# Altium PCB UP-Buzzer-PCB.PcbDoc
Units mil, origin at the board's own origin, x right, y up, seen from the top; angles counter-clockwise.
Board outline 740 x 1530 mil, 2 copper layers (Top Layer, Bottom Layer), stack 65.8 mil thick; 22 components, 34 nets, 90 pads, 5 vias.
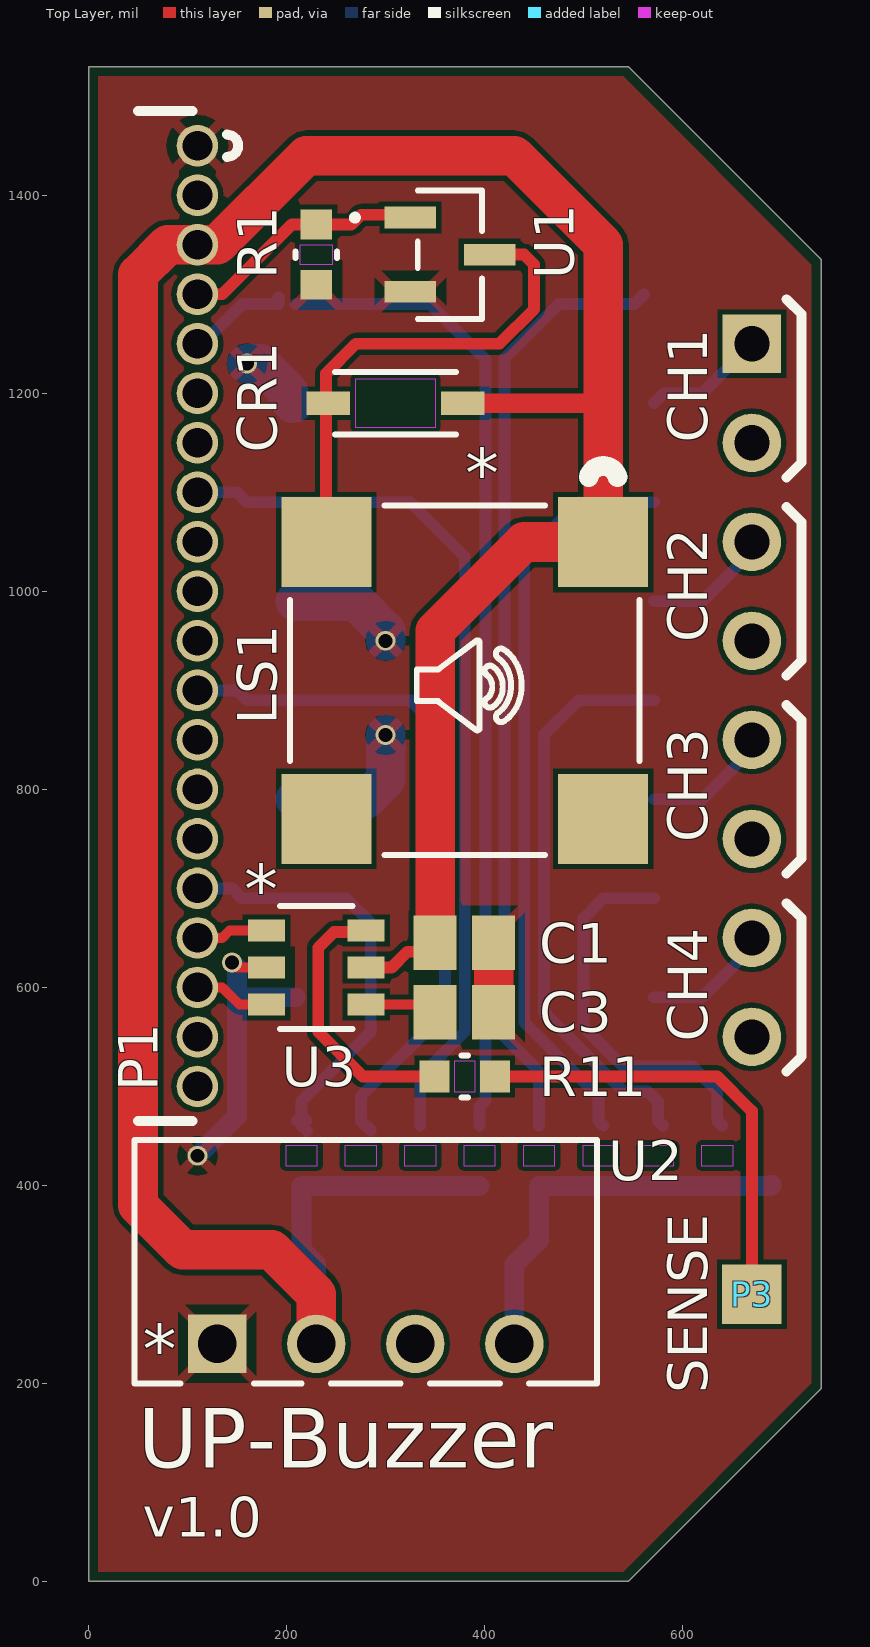
[diagram p0: Top Layer view]
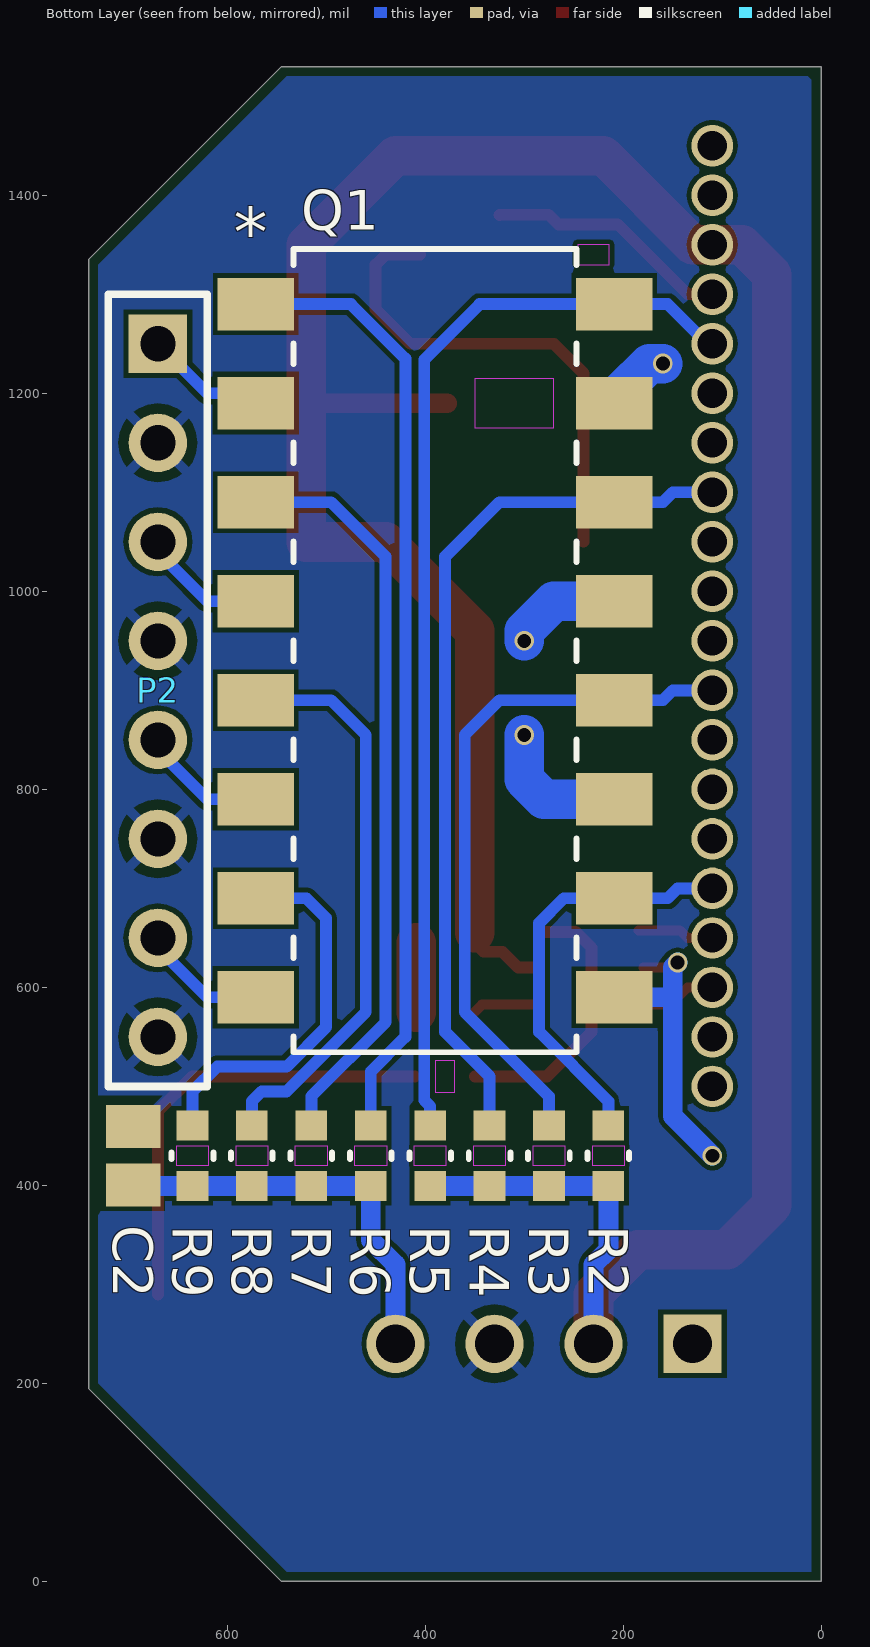
[diagram p1: Bottom Layer view, seen from below]
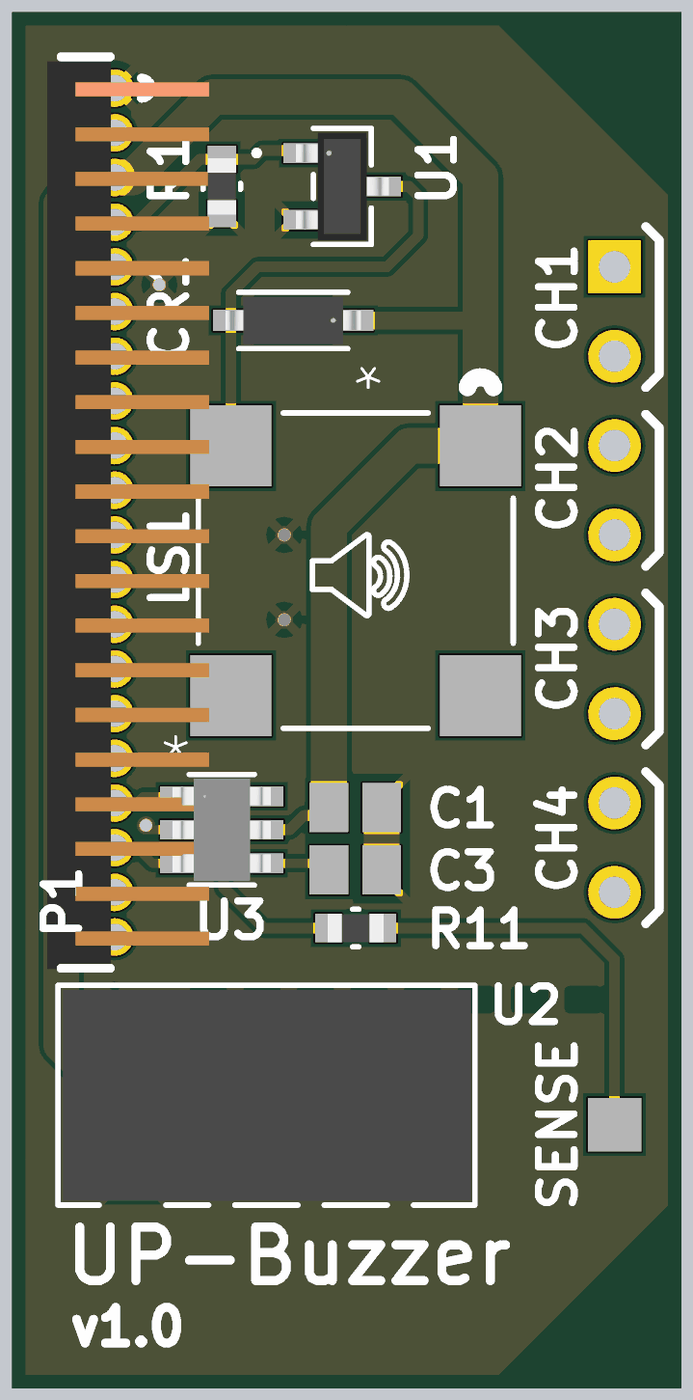
[diagram p2: 3D render of the assembled board from above, using the file's embedded part models]
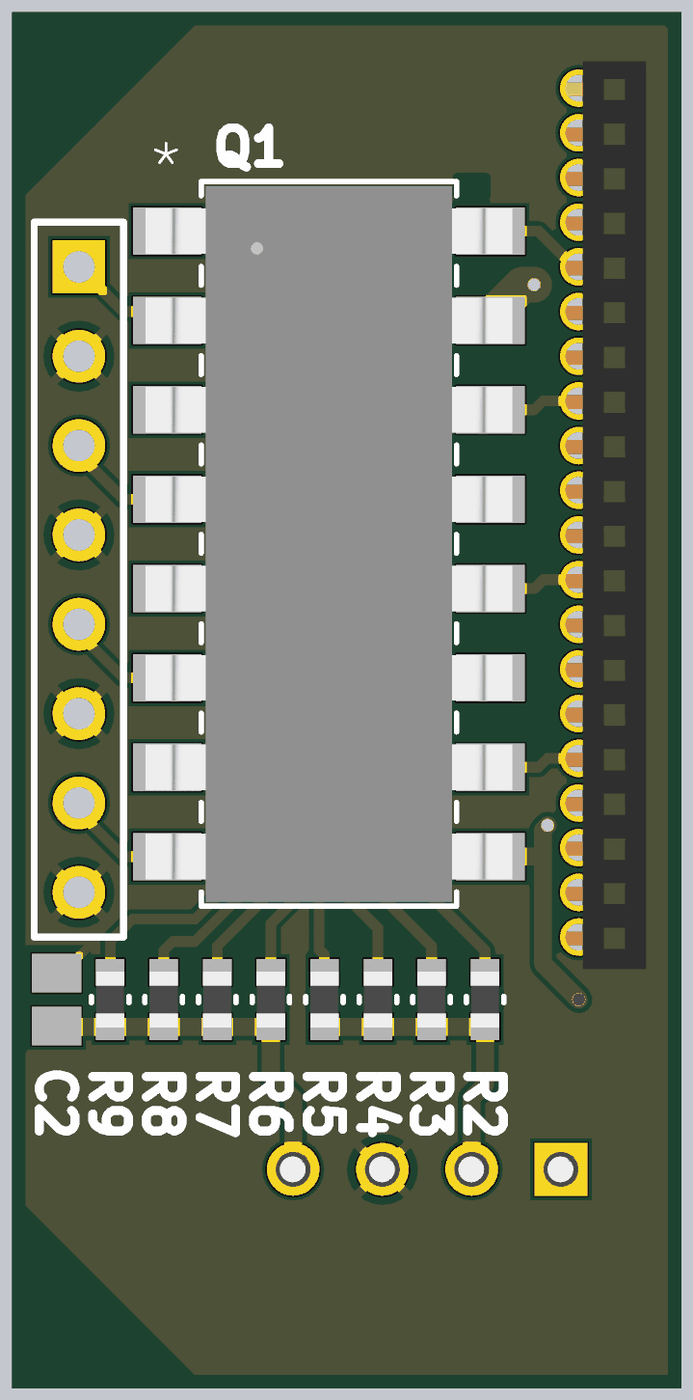
[diagram p3: 3D render of the assembled board from below, using the file's embedded part models]

## Layer stack, top to bottom
Top Solder: solder mask 0.4, Solder Resist, Dk 3.5
Top Layer: signal copper 1.4
Dielectric 1: dielectric 63, FR-4, Dk 4.8
Bottom Layer: signal copper 1.4
Bottom Solder: solder mask 0.4, Solder Resist, Dk 3.5

## Board outline
0,0 545,0 740,195 740,1335 545,1530 0,1530

## Design rules (kind name [scope] priority, off if disabled: settings)
Clearance [All] p1: gap=5 ignorepadtopadclearanceinfootprint=FALSE
ComponentClearance [All] p1: gap=5 collisioncheckmode=3 verticalgap=5 showdistances=TRUE
DiffPairsRouting [All] p1: maxlimit=10 minlimit=5 mostfreqgap=5 toplayer_minwidth=5 toplayer_maxwidth=1000 toplayer_prefwidth=5 bottomlayer_minwidth=5 bottomlayer_maxwidth=1000 bottomlayer_prefwidth=5 maxuncoupledlength=500
Height [All] p1: minheight=0 maxheight=71497.94 prefheight=500
HoleSize [All] p1: absolutevalues=TRUE maxlimit=248.03 minlimit=11.81 maxpercent=80.000 minpercent=20.000
HoleToHoleClearance ViaHoleToHoleClearance [IsVia vs IsVia] p1: gap=8 allowstackedmicrovias=FALSE
HoleToHoleClearance [All] p2: gap=10 allowstackedmicrovias=TRUE
MinimumAnnularRing [All] p1: minimumring=3
MinimumSolderMaskSliver [All] p1: minsoldermaskwidth=0
PlaneClearance [All] p1: clearance=5
PlaneConnect PlaneConnectPowerPads [InPadClass('PowerPads')] p1: planeconnectstyle=Direct reliefexpansion=20 reliefentries=4 reliefconductorwidth=10 reliefairgap=10
PlaneConnect [All] p2: planeconnectstyle=Relief reliefexpansion=20 reliefentries=4 reliefconductorwidth=10 reliefairgap=10
PolygonConnect PolygonConnectPowerPads [All vs (InPadClass('PowerPads'))] p1: connectstyle=Direct reliefconductorwidth=10 reliefentries=4 polygonreliefangle="90 Angle" airgapwidth=10
PolygonConnect [All] p2: connectstyle=Relief reliefconductorwidth=10 reliefentries=4 polygonreliefangle="45 Angle" airgapwidth=10
RoutingVias [All] p1: holewidth=11.81 width=23.62 viastyle="Through Hole" minholewidth=6 minwidth=12 maxholewidth=248.03 maxwidth=248.03
SilkToSilkClearance [All] p1: silktosilkclearance=0
SilkToSolderMaskClearance [IsPad] p1: minsilkscreentomaskgap=5.91 clearancetoexposedcopper=TRUE
SolderMaskExpansion [All] p1: expansion=2 istentingtop=FALSE
UnpouredPolygon BoardOutlineClearance [All] p2:
Width [All] p1: maxlimit=1000 minlimit=10 preferedwidth=12
Width Power [InNet('+3V3') or InNet('+12V')Or InNet('+3V3_ISO') Or InNet('GND') Or InNet('GND_ISO')] p2: maxlimit=1000 minlimit=20 preferedwidth=40 minimp=50.000000 maximp=50.000000 favimp=50.000000
20 further rules are at their usual default settings.

## Classes and differential pairs
component class Isolated-Inputs-Schematic: C1 C2 P2 Q1 R2 R3 R4 R5 R6 R7 R8 R9 U2
component class Buzzer-Schematic: CR1 LS1 P1 R1 U1
component class Proximity-Sensor-Schematic: C3 P3 R11 U3
net class CH_ISO[1..4]: CH_ISO1 CH_ISO2 CH_ISO3 CH_ISO4

## Components (designator, comment, footprint, x,y, rotation, side; value= is the part's Value field where it differs from the comment)
C1 "Cap Pol3" C0805 379.53,645 r0 top
C2 "Cap Pol3" C0805 695,430 r90 bottom
C3 "Cap Pol3" C0805 379.53,575 r0 top
CR1 "1N4148W-7-F" SOD123_DIO 310,1190 r180 top
LS1 "MLT-8530" MLT-8530_JHE 380,910 r270 top
P1 "SMS-120-01-T-S" SMS-S-120 110,1450 r270 top locked
P2 "Header 8" HDR1X8 670,1250 r270 bottom
P3 "Pad" Simple-PAD-PCB 670,290 r90 top
Q1 "LTV-847S" LTV-847S_LTO 390,940 r180 bottom
R1 "RC0603FR-07470RL" RC0603N_YAG 230,1340 r90 top
R2 "50k" RC0603N_YAG 215,430 r270 bottom
R3 "50k" RC0603N_YAG 275,430 r270 bottom
R4 "50k" RC0603N_YAG 335,430 r270 bottom
R5 "50k" RC0603N_YAG 395,430 r270 bottom
R6 "1k" RC0603N_YAG 455,430 r270 bottom
R7 "1k" RC0603N_YAG 515,430 r270 bottom
R8 "1k" RC0603N_YAG 575,430 r270 bottom
R9 "1k" RC0603N_YAG 635,430 r270 bottom
R11 "470" RC0603N_YAG 380,510 r180 top
U1 "IRLML6344TRPBF" IRLML6344TRPBF_INF 365,1340 r270 top
U2 "B0303S-1WR3" SIP4_B_S-1WR3_MNS 130,240 r0 top
U3 "IQS127D-00000-TSR" TSOT23-6_AZQ 230,620 r0 top

## Footprints (in the part's own frame and the unit in brackets; to place one, negate y for a bottom-side part, rotate by r counter-clockwise, add the part's x,y. Pads: shape width x height; smd on the part's side, far side on the other; paste and mask are expansions set on the pad)
C0805 [mm] "Chip Capacitor, Body 2.0x1.3mm, IPC High Density"
  rect 1.1x1.4 smd: 1(-0.75,0) 2(0.75,0)
  body extent -1.1,-0.72 1.1,0.72, height 1.4
HDR1X8 [mm] "Connector; Header; 8 Position"
  rect 1.5x1.5 hole 0.9: 1(0,0)
  round 1.5 hole 0.9: 2(2.54,0) 3(5.08,0) 4(7.62,0) 5(10.16,0) 6(12.7,0) 7(15.24,0) 8(17.78,0)
  silkscreen extent -1.27,-1.27 19.05,1.27
IRLML6344TRPBF_INF [mil]
  rect 22x52 smd paste+0: 1(-37.4,-39.97) 2(37.4,-39.97) 3(0,39.97)
  silkscreen extent -65,-99 65,33, body extent -60,-52 60,52, height 44
LTV-847S_LTO [mil]
  rect 77x53 smd paste+0: 1(-181,350) 2(-181,250) 3(-181,150) 4(-181,50) 5(-181,-50) 6(-181,-150) 7(-181,-250) 8(-181,-350) 9(181,-350) 10(181,-250) 11(181,-150) 12(181,-50) 13(181,50) 14(181,150) 15(181,250) 16(181,350)
  silkscreen extent -143,-406 143,406, body extent -206,-401 206,401, height 157
MLT-8530_JHE [mil]
  rect 91x91 smd paste+0: 1(-139.76,139.76) 2(-139.76,-139.76) 3(139.76,139.76) 4(139.76,-139.76)
  silkscreen extent -217,-177 177,177, body extent -172,-172 172,172, height 118
RC0603N_YAG [mil]
  rect 30x32 smd paste+0: 1(-30.5,0) 2(30.5,0)
  Keep-Out Layer region: -10,-16 -10,16 10,16 10,-16
  silkscreen extent -3,-21 3,21, body extent -31,-16 31,16, height 28
Simple-PAD-PCB [mil]
  rect 60x60 smd: 1(0,0)
SIP4_B_S-1WR3_MNS [mil]
  rect 59x59 / inner round 60 / far side rect 59x59 hole 39 paste-99999: 1(0,0)
  round 59 / inner round 60 / far side round 59 hole 39 paste-99999: 2(100,0) 3(200,0) 4(300,0)
  silkscreen extent -84,-40 384,206, body extent -78,-35 379,201, height 400
SMS-S-120 [mil]
  round 42 / inner round 60 / far side round 42 hole 30 paste-99999: 1(0,0) 2(50,0) 3(100,0) 4(150,0) 5(200,0) 6(250,0) 7(300,0) 8(350,0) 9(400,0) 10(450,0) 11(500,0) 12(550,0) 13(600,0) 14(650,0) 15(700,0) 16(750,0) 17(800,0) 18(850,0) 19(900,0) 20(950,0)
  silkscreen extent -35,-60 985,41, body extent -30,-182 986,2, height 71
SOD123_DIO [mm]
  rect 1.111x0.601 smd: 1(-1.725,0) 2(1.725,0)
  Keep-Out Layer region: -1.016,-0.624 -1.016,0.624 1.016,0.624 1.016,-0.624
  silkscreen extent -1.55,-0.8 1.55,0.8, body extent -1.93,-0.68 1.92,0.67, height 0.81
TSOT23-6_AZQ [mil]
  rect 37.5x22 smd paste+0: 1(-50.25,37.4) 2(-50.25,0) 3(-50.25,-37.4) 4(50.25,-37.4) 5(50.25,0) 6(50.25,37.4)
  silkscreen extent -36,-62 36,62, body extent -55,-57 55,57, height 39

## Part data
C1 C2 C3: "Polarized Capacitor (Surface Mount)"
CR1 LS1 P1 Q1 R1 U1 U3: "No Description Available"
P2: "Header, 8-Pin"
R2 R3 R4 R5 R6 R7 R8 R9 R11: library part RC0603FR-07470RL, "No Description Available"

## Via types
v1: diameter 20, hole 14, Top Layer to Bottom Layer, tented both sides, 5 vias

## Nets (pads, with @x,y where several pads share a name; then routed paths per layer and width w, separated by ;. In a path a pad name is that pad's centre, name@x,y a point inside that pad or via, vN(x,y) a via of type N, cw(c..) or ccw(c..) an arc to the next point about the centre after c; other vN are vias at no path point)
+3V3: P1.2
+3V3_ISO: C2.1 R6.2 R7.2 R8.2 R9.2 U2.4 | length 405.3
  Bottom Layer w20: U2.4 430,320 455,345 R6.2 R8.2 R9.2 689.03,399.5 C2.1@690,400.47
CH1_ISO: P2.1 Q1.2 | length 123.9
  Bottom Layer w12: Q1.2 581,1200 620,1200 P2.1
CH2_ISO: P2.3 Q1.4 | length 129.7
  Bottom Layer w12: Q1.4 620,990 670,1040 P2.3
CH3_ISO: P2.5 Q1.6 | length 129.7
  Bottom Layer w12: Q1.6 620,790 670,840 P2.5
CH4_ISO: P2.7 Q1.8 | length 129.7
  Bottom Layer w12: Q1.8 620,590 670,640 P2.7
GND: C1.2 C3.2 P1.1 Q1.9 Q1.11 Q1.13 Q1.15 R1.1 U1.2 U2.1 U3.2 | length 697.3
  Top Layer w10: v1@150,620 U3.2
  Top Layer w40: C3.2 C1.2
  Bottom Layer w20: v1(110,430) 150,470 150,590 ; v1(145,625) 150,620 150,590 ; Q1.9 150,590
  Bottom Layer w40: v1(160,1230) 173.5,1230 201.5,1202 201.5,1195 Q1.15@206.5,1190 ; Q1.11 280,790 300,810 v1(300,855) ; Q1.13 270,990 300,960 v1(300,950)
GND_ISO: C2.2 P2.2 P2.4 P2.6 P2.8 U2.3
NetC3_1: C3.1 U3.4 | length 68.4
  Top Layer w10: U3.4@285.25,582.6 C3.1@342.87,582.6 ; C3.1@342.4,582.6 C3.1
NetCR1_2: CR1.2 LS1.2 U1.3 | length 501.1
  Top Layer w12: LS1.2@240,1050 240,1220 270,1250 415,1250 450,1285 450,1330 440,1340 U1.3
NetP1_4: P1.4 R1.2 U1.1 | length 243.3
  Top Layer w12: P1.4@115,1300 135,1300 205.5,1370.5 R1.2 265.28,1370.32 275.3,1380.25 U1.1@325,1380
NetP1_5: P1.5 Q1.16 R5.1 | length 1096.8
  Bottom Layer w12: P1.5 115,1250 155,1290 192,1290 Q1.16@192,1297.04 ; Q1.16 345,1290 401,1234 401,486 395,480 R5.1
NetP1_6: P1.6
NetP1_7: P1.7
NetP1_8: P1.8 Q1.14 R4.1 | length 890.1
  Bottom Layer w12: P1.8 150,1100 160,1090 Q1.14 325,1090 380,1035 380,555 335,510 R4.1
NetP1_9: P1.9
NetP1_10: P1.10
NetP1_11: P1.11
NetP1_12: P1.12 Q1.12 R3.1 | length 707.5
  Bottom Layer w12: P1.12 150,900 160,890 Q1.12 325,890 360,855 360,575 275,490 275,465.5 R3.1@285,455.5
NetP1_13: P1.13
NetP1_14: P1.14
NetP1_15: P1.15
NetP1_16: P1.16 Q1.10 R2.1 | length 440.9
  Bottom Layer w12: P1.16 145,700 155,690 Q1.10 260,690 285,665 285,555 215,485 R2.1 R2.1@220.73,454.77 ; R2.1@210.25,465.25 219.75,465.25 R2.1@220,465.5
NetP1_17: P1.17 U3.1 | length 77.8
  Top Layer w10: P1.17 135,650 142.4,657.4 U3.1@184.75,657.4
NetP1_18: P1.18 U3.3 | length 82
  Top Layer w10: P1.18 135,600 152.4,582.6 U3.3@184.75,582.6
NetP1_19: P1.19
NetP1_20: P1.20
NetP3_1: P3.1 R11.1 | length 459
  Top Layer w12: R11.1 635,510 670,475 P3.1
NetQ1_1: Q1.1 R6.1 | length 956.9
  Bottom Layer w12: R6.1 455,515 420,550 420,1235 475,1290 551,1290 Q1.1@561,1300
NetQ1_3: Q1.3 R7.1 | length 761.4
  Bottom Layer w12: R7.1@520,460.5 515,465.5 515,490 440,565 440,1035 495,1090 Q1.3
NetQ1_5: Q1.5 R8.1 | length 584.3
  Bottom Layer w12: Q1.5 495,890 460,855 460,575 540,495 565,495 575,485 575,465.5 R8.1@580,460.5
NetQ1_7: Q1.7 R9.1 | length 387.8
  Bottom Layer w12: Q1.7 520,690 500,670 500,560 540,520 610,520 635,495 635,465.5 R9.1@640,460.5
NetR11_2: R11.2 U3.6 | length 281.6
  Top Layer w12: U3.6@285.25,657.4 283.85,656 248,656 232,640 232,555 277,510 R11.2
VDD2: C1.1 CR1.1 LS1.1 P1.3 R2.2 R3.2 R4.2 R5.2 U2.2 U3.5 | length 3138.9
  Top Layer w12: U3.5@285.25,620 306,620 322,636 341,636 C1.1
  Top Layer w20: CR1.1 520,1190
  Top Layer w40: U2.2 230,290 185,335 95,335 50,380 50,1320 80,1350 P1.3 130,1350 220,1440 430,1440 520,1350 LS1.1@520,1049.76 ; C1.1@350,655.47 350,960 439.76,1049.76 LS1.1
  Bottom Layer w20: U2.2 230,320 215,335 R2.2 R3.2 R5.2
pads on no net: LS1.3 LS1.4

## Polygon pours and split planes (outlines as drawn)
GND on Top Layer "Top Layer-GND" (solid, pour order 2): 10,1520 540,1520 730,1330 730,200 540,10 10,10
GND_ISO on Bottom Layer "Bot Layer-GND_ISO" (solid, remove dead copper, pour order 3): 10,1520 540,1520 730,1330 730,200 540,10 10,10

## Silkscreen, mask and mechanical layers (free items; w line width, h text height)
Top Overlay:
  drawing of 181 lines, arcs and shapes, not listed
  text "CH1" at 625,1150 h40 r90
  text "CH2" at 625,948.33 h40 r90
  text "CH3" at 625,746.67 h40 r90
  text "CH4" at 625,545 h40 r90
  text "SENSE" at 625,190 h40 r90
  text "UP-Buzzer" at 50,115 h60
  text "v1.0" at 55,45 h40
Board Shape:
  the board outline again, w10

## Text inside footprints (layer, text, board x,y; h text height)
CR1: Top Overlay "*" at 415,1165 h50 r180; Mechanical 13 "*" at 368.6,1215 h50 r180
Q1: Mechanical 13 "*" at 525.5,1287.5 h50; Bottom Overlay "*" at 593.5,1338 h50
U2: Top Overlay "*" at 55,210 h50; Mechanical 13 "*" at 49,215 h50
U3: Top Overlay "*" at 157.25,674.4 h50